# Altium PCB ver7.PcbDoc
Units mm, origin at the board's own origin, x right, y up, seen from the top; angles counter-clockwise.
Board outline 73.02 x 118.13 mm, 2 copper layers (Top Layer, Bottom Layer); 39 components, 19 nets, 171 pads, 12 vias.
Unrouted connection lines stored in the file: 87.
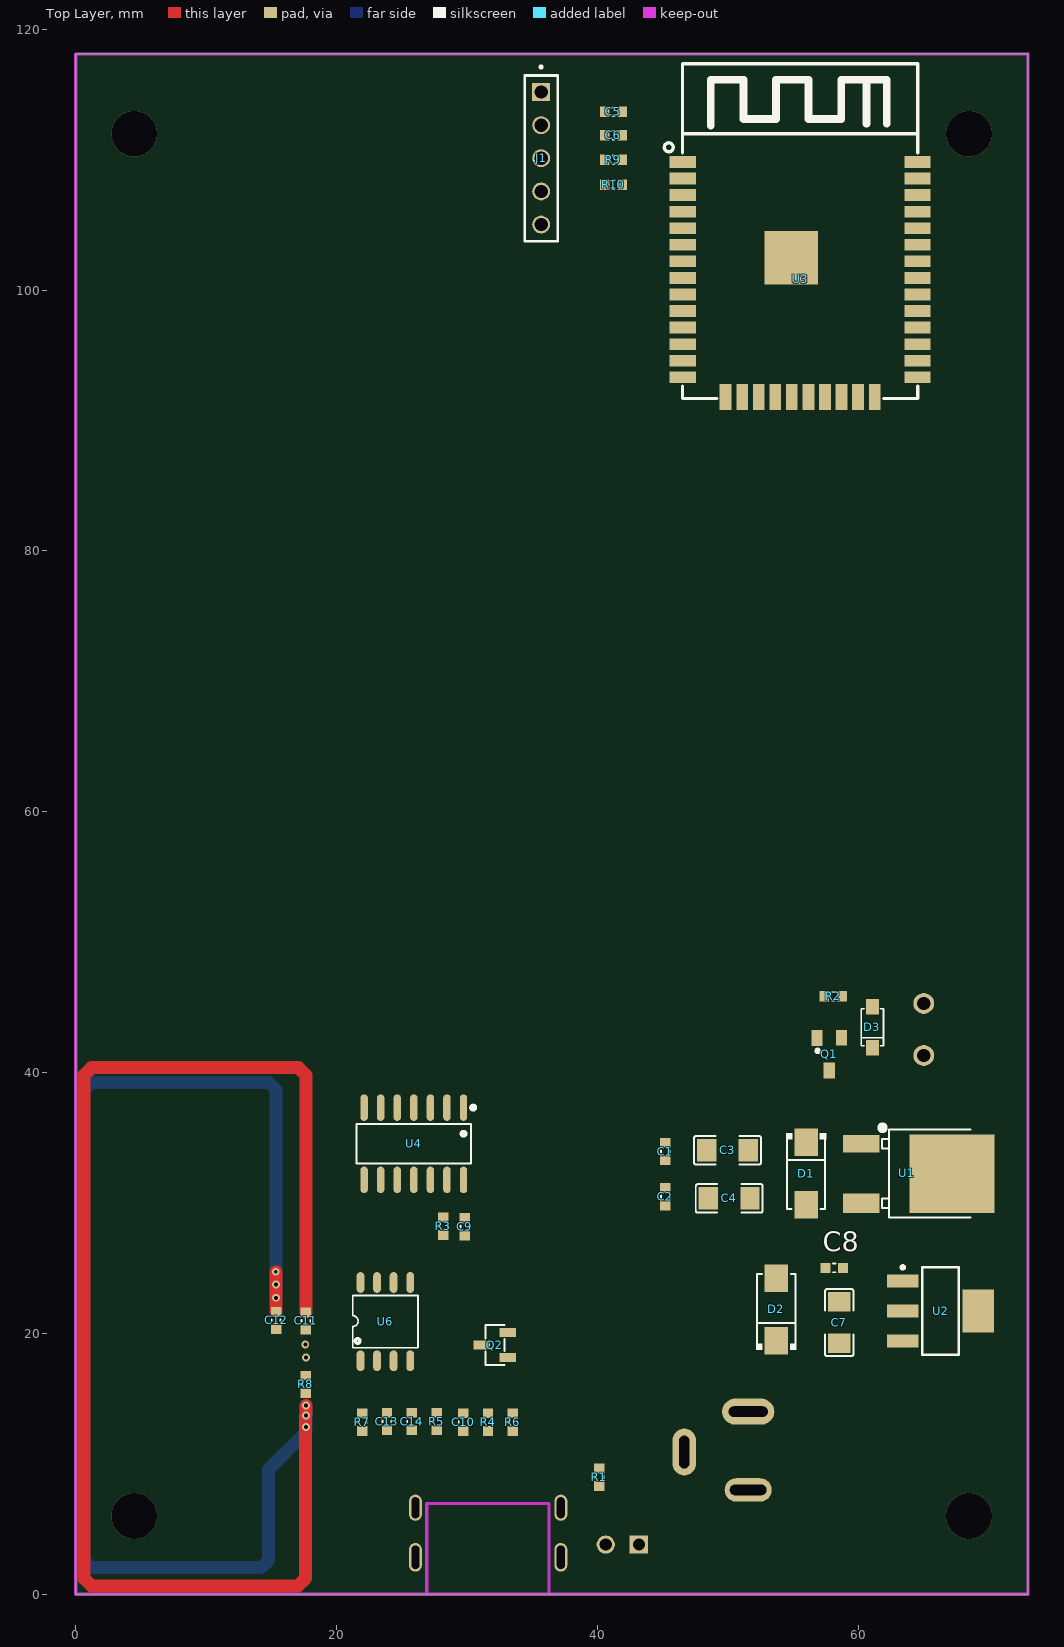
[diagram p0: Top Layer view]
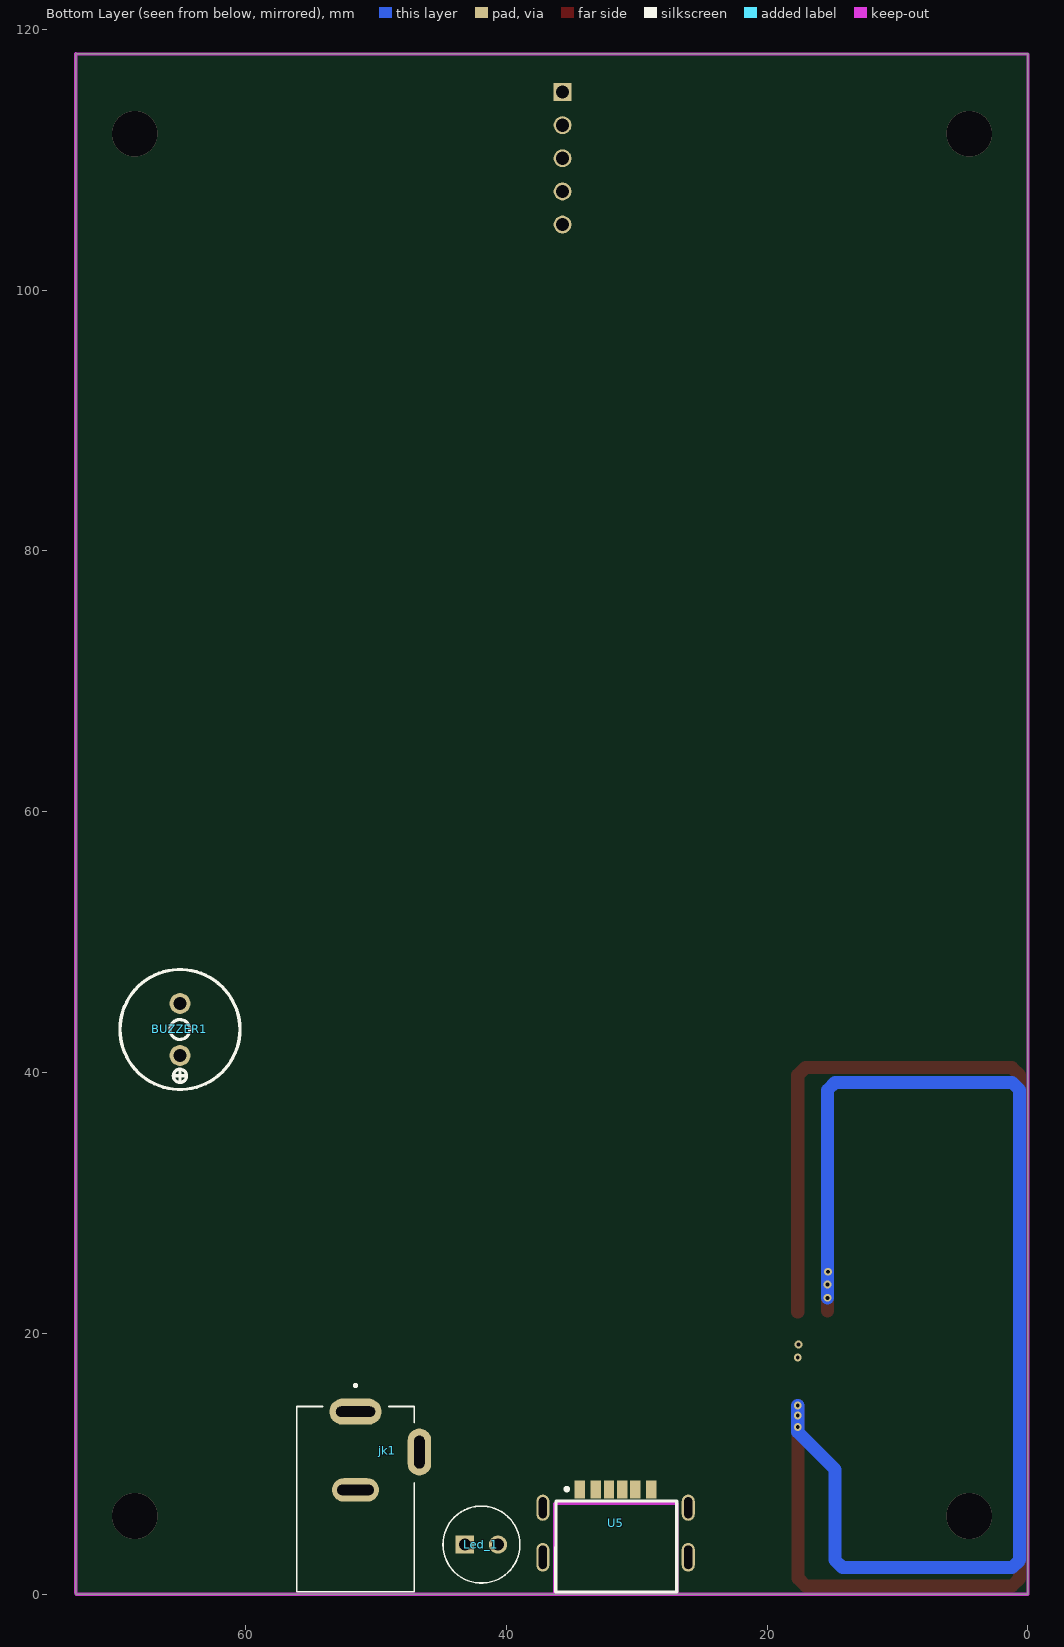
[diagram p1: Bottom Layer view, seen from below]

## Layer stack, top to bottom
Top Solder: solder mask 0.0102, Solder Resist, Dk 3.5
Top Layer: signal copper 0.0356
Dielectric 1: dielectric 0.32, FR-4, Dk 4.8
Bottom Layer: signal copper 0.0356
Bottom Solder: solder mask 0.0102, Solder Resist, Dk 3.5

## Board outline
0,0 73,0 73.016,0.127 73.016,118.127 73,118.109 0,118.11

## Design rules (kind name [scope] priority, off if disabled: settings)
Clearance [All] p1: gap=0.508 ignorepadtopadclearanceinfootprint=FALSE
PolygonConnect [All] p1: connectstyle=Relief reliefconductorwidth=0.254 reliefentries=4 polygonreliefangle="90 Angle" airgapwidth=0.254
RoutingVias [All] p1: holewidth=0.4 width=0.8 viastyle="Through Hole" minholewidth=0.3 minwidth=0.6 maxholewidth=0.4 maxwidth=0.8
SolderMaskExpansion [All] p1: expansion=0.102 istentingtop=FALSE
Width [InNet('3V3') or ('5V') or InNet('9V') or InNet('GND')] p1: maxlimit=0.381 minlimit=0.254 preferedwidth=0.381
Width Width_1 [All] p2: maxlimit=0.762 minlimit=0.254 preferedwidth=0.381
30 further rules are at their usual default settings.

## Classes and differential pairs
component class ver_4: BUZZER1 C1 C2 C3 C4 C6 C7 C9 C10 C12 C13 C14 D1 D2 D3 jk1 Led_1 Q Q1 Q2 R1 R2 R3 R4 R5 R6 R7 R8 R9 R10 U1 U2 U3 U4 U5 U6

## Components (designator, comment, footprint, x,y, rotation, side; value= is the part's Value field where it differs from the comment)
BUZZER1 "buzzer_9x5.5" buzzer_9x5.5 65.024,43.307 r0 bottom
C1 "0.1uF" CN-SMD-0603 45.212,33.949 r90 top
C2 "0.1uF" CN-SMD-0603 45.212,30.48 r270 top
C3 "22uF" cap_1206 49.98,34.036 r0 top
C4 "22uF" cap_1206 50.107,30.353 r0 top
C5 "0.1uF" CN-SMD-0603 41.235,113.665 r0 top
C6 "10uF" CN-SMD-0603 41.235,111.887 r0 top
C7 "22uF" cap_1206 58.547,20.828 r270 top
C8 "0.1uF" CN-SMD-0603 58.166,25.019 r180 top
C9 "104" CN-SMD-0603 29.845,28.194 r90 top
C10 "150pF" CN-SMD-0603 29.709,13.205 r270 top
C11 "100pF" CN-SMD-0603 17.653,20.955 r90 top
C12 "1nF" CN-SMD-0603 15.367,20.995 r90 top
C13 "104" CN-SMD-0603 23.867,13.245 r270 top
C14 "104" CN-SMD-0603 25.772,13.245 r270 top
D1 "diode_1N4007(M7)" diode_1N4007-M7 56.007,32.258 r270 top
D2 "diode_1N4007(M7)" diode_1N4007-M7 53.721,21.844 r90 top
D3 "1N4148" SOD-123 61.047,43.425 r270 top value=1N4007
J1 "JP5x1" JP5x1 35.687,117.094 r270 top
jk1 "jack dc" "jack dc" 51.562,14.001 r270 bottom
Led_1 "led_5mm" led_5mm 41.91,3.81 r180 bottom
Q1 "AO3400" SOT23B 57.785,41.402 r180 top value=C1815
Q2 "J3Y" j3y -398.459,440.676 r0 top
R1 "1K" RES-SMD-0603 40.132,8.977 r90 top value="R1/4W - 1K"
R2 "1K" RES-SMD-0603 58.079,45.847 r0 top value="R1/4W - 1K"
R3 "2.2K" RES-SMD-0603 28.194,28.234 r90 top value="R1/4W - 1K"
R4 "6.8K" RES-SMD-0603 31.614,13.205 r90 top value="R1/4W - 1K"
R5 "1K" RES-SMD-0603 27.677,13.245 r270 top value="R1/4W - 1K"
R6 "2.2K" RES-SMD-0603 33.519,13.205 r270 top value="R1/4W - 1K"
R7 "47K" RES-SMD-0603 21.962,13.205 r90 top value="R1/4W - 1K"
R8 "1K5" RES-SMD-0603 17.653,16.089 r90 top value="R1/4W - 1K"
R9 "10K" RES-SMD-0603 41.235,109.982 r180 top value="R1/4W - 1K"
R10 "10K" RES-SMD-0603 41.235,108.077 r180 top value="R1/4W - 1K"
U1 "78M05" 78M05 64.643,32.385 r0 top
U2 "AMS1117" AMS1117-SOT223 66.315,21.717 r0 top
U3 "ESP32-WROOM-32" ESP-32-WROOM 54.911,102.503 r0 top
U4 "SN74HC14DRG4" 74HC14 26.035,34.544 r180 top
U5 "USB-TYPE-C-6-PIN-CONG" USB-TYPE-C-6-PIN-CONG 31.623,4.318 r180 bottom
U6 "MC12079" MC12079 23.74,20.904 r0 top

## Footprints (in the part's own frame and the unit in brackets; to place one, negate y for a bottom-side part, rotate by r counter-clockwise, add the part's x,y. Pads: shape width x height; smd on the part's side, far side on the other; paste and mask are expansions set on the pad)
74HC14 [mm]
  oval 0.574x2.038 smd paste+0 mask+0.051: 1(-3.699,-2.769) 2(-2.429,-2.769) 3(-1.159,-2.769) 4(0.111,-2.769) 5(1.381,-2.769) 6(2.651,-2.769) 7(3.921,-2.769) 8(3.921,2.769) 9(2.651,2.769) 10(1.381,2.769) 11(0.111,2.769) 12(-1.159,2.769) 13(-2.429,2.769) 14(-3.699,2.769)
  silkscreen extent -4.59,-2.92 4.51,1.52
78M05 [mm]
  rect 2.8x1.35 smd paste+0 mask+0.051: 1(-4.4,2.174)
  rect 2.8x1.5 smd paste+0 mask+0.051: 3(-4.4,-2.406)
  rect 6.5x6 smd paste+0 mask+0.051: 4(2.55,-0.134)
  silkscreen extent -2.98,-3.51 3.98,3.59
AMS1117-SOT223 [mm]
  rect 2.4x1 smd: 1(-2.9,2.3) 2(-2.9,0) 3(-2.9,-2.3)
  rect 2.4x3.3 smd: 2(2.9,0)
  silkscreen extent -3.02,-3.35 1.4,3.47, body extent -3.39,-3.27 3.5,3.23, height 1.72
buzzer_9x5.5 [mm]
  round 1.6 hole 1 paste+0 mask+0.051: 1(0,1.999) 2(0,-1.999)
  silkscreen extent -4.6,-4.6 4.6,4.6
cap_1206 [mm]
  rect 1.485x1.728 smd paste-100 mask+0.051: 1(-1.593,0) 2(1.593,0)
  silkscreen extent -2.56,-1.09 2.56,1.09
CN-SMD-0603 [mm]
  round 0.254 on Mech15: 0(0,0)
  rect 0.75x0.8 smd: 1(-0.675,0) 2(0.675,0)
  silkscreen extent -0.1,-0.34 0.1,0.34, body extent -0.8,-0.43 0.8,0.43, height 0.8
diode_1N4007-M7 [mm]
  rect 2.1x1.8 smd paste+0 mask+0.051: 1(-2.4,0) 2(2.4,0)
  silkscreen extent -3.08,-1.54 2.7,1.54
ESP-32-WROOM [mm]
  rect 2x0.9 smd paste+0 mask+0.05: 1(-8.367,7.326) 2(-8.367,6.056) 3(-8.367,4.786) 4(-8.367,3.516) 5(-8.367,2.246) 6(-8.367,0.976) 7(-8.367,-0.294) 8(-8.367,-1.564) 9(-8.367,-2.834) 10(-8.367,-4.104) 11(-8.367,-5.374) 12(-8.367,-6.644) 13(-8.367,-7.914) 14(-8.367,-9.184) 25(9.633,-9.184) 26(9.633,-7.914) 27(9.633,-6.644) 28(9.633,-5.374) 29(9.633,-4.104) 30(9.633,-2.834) 31(9.633,-1.564) 32(9.633,-0.294) 33(9.633,0.976) 34(9.633,2.246) 35(9.633,3.516) 36(9.633,4.786) 37(9.633,6.056) 38(9.633,7.326)
  rect 0.9x2 smd paste+0 mask+0.05: 15(-5.082,-10.684) 16(-3.812,-10.684) 17(-2.542,-10.684) 18(-1.272,-10.684) 19(-0.002,-10.684) 20(1.268,-10.684) 21(2.538,-10.684) 22(3.808,-10.684) 23(5.078,-10.684) 24(6.348,-10.684)
  rect 4.1x4.1 smd paste+0 mask+0.05: 39(-0.047,-0.014)
  silkscreen extent -9.78,-10.81 9.65,14.86
j3y [mm]
  rect 1.25x0.7 smd paste+0 mask+0.051: 1(431.596,-422.514) 2(431.596,-420.614) 3(429.597,-421.564)
  silkscreen extent 429.87,-423.09 431.32,-420.04
"jack dc" [mm]
  oval 2x4 hole 0.8 slot 3 at 90 deg: 1(0,0)
  oval 1.8x3.6 hole 0.8 slot 2.8 at 90 deg: 2(6,0)
  oval 3.6x1.8 hole 0.8 slot 2.5 at 0 deg: 3(3.1,4.9)
  silkscreen extent -2.1,-4.5 13.8,4.5
JP5x1 [mm]
  rect 1.37x1.37 hole 1.02: 01(1.905,0)
  round 1.37 hole 1.02: 02(4.445,0) 03(6.985,0) 04(9.525,0) 05(12.065,0)
  silkscreen extent -0.11,-1.27 13.33,1.27
led_5mm [mm]
  round 1.4 hole 0.93: A(1.27,0)
  rect 1.4x1.4 / inner round 1.4 / far side rect 1.4x1.4 hole 0.93: C(-1.27,0)
  silkscreen extent -2.95,-2.95 2.95,2.95, body extent -2.5,-2.95 2.95,2.95, height 9.6
MC12079 [mm]
  oval 0.6x1.6 smd paste+0 mask+0.051: 1(-1.905,-3) 2(-0.635,-3) 3(0.635,-3) 4(1.905,-3) 5(1.905,3) 6(0.635,3) 7(-0.635,3) 8(-1.905,3)
  silkscreen extent -2.5,-2 2.5,2
RES-SMD-0603 [mm]
  round 0.254 on Mech15: 0(0,0)
  rect 0.75x0.8 smd: 1(-0.675,0) 2(0.675,0)
  silkscreen extent -0.1,-0.34 0.1,0.34, body extent -0.8,-0.4 0.8,0.4, height 0.43
SOD-123 [mm]
  rect 1.2x1 smd: 1(-1.635,0.04) 2(1.515,0.04)
  silkscreen extent -1.48,-0.81 1.37,0.89, body extent -1.98,-0.81 1.87,0.89, height 1.43
SOT23B [mm]
  rect 0.85x1.2 smd: 1(0.946,-1.255) 2(0.006,1.24) 3(-0.944,-1.26)
  silkscreen extent 0.77,-0.39 1.02,-0.14, body extent -1.49,-1.31 1.51,1.19, height 1.06
USB-TYPE-C-6-PIN-CONG [mm]
  oval 1x2.2 hole 0.6 slot 1.8 at 90 deg paste+0 mask+0.051: 7(-5.575,-1.482) 8(5.575,-1.482)
  oval 1x2 hole 0.6 slot 1.6 at 90 deg paste+0 mask+0.051: 7(-5.575,2.318) 8(5.575,2.318)
  rect 0.8x1.4 smd paste-100 mask+0.051: A5(-0.5,3.718) A9(1.52,3.718) A12(2.75,3.718) B5(0.5,3.718) B9(-1.52,3.718) B12(-2.75,3.718)
  Keep-Out Layer lines w0.254: 4.715,-4.251 4.715,2.649 -4.455,2.649 -4.66,2.649 -4.66,-4.291
  silkscreen extent -4.58,-4.14 4.69,3.88

## Part data
C1 C2 C8: library part "CAP 104"
C3 C4 C7: library part cap_1206
C5 C6 C9 C10 C11 C12 C13 C14: library part "Tu 0805_1", "Tu 0805", Bottom=10, Right=20
D3: library part D1A, "Diode 1A"
Q1: library part C1815, "NPN 600mW, ECB"
Q2: library part S8050/J3Y/0.4
R1 R2: library part Res, "Resistor 1/4W"
R3 R4 R5 R6 R7 R8 R9 R10: library part "Tro 0805_1", "Tro 0805"

## Via types
v1: diameter 0.6, hole 0.3, Top Layer to Bottom Layer, 8 vias
v2: diameter 3.5, hole 3.5, Top Layer to Bottom Layer, 4 vias

## Nets (pads, with @x,y where several pads share a name; then routed paths per layer and width w, separated by ;. In a path a pad name is that pad's centre, name@x,y a point inside that pad or via, vN(x,y) a via of type N, cw(c..) or ccw(c..) an arc to the next point about the centre after c; other vN are vias at no path point)
3V3: C5.2 C6.2 C7.2 C8.2 D2.2 R9.2 R10.2 U2.2 U3.2
4A: Q2.3 R3.2 R4.2 U4.9
4Y: U4.8 U4.11
5V: BUZZER1.1 C2.2 C4.2 C9.2 C13.2 C14.2 D1.2 D2.1 D3.2 R1.2 R3.1 R7.1 U1.3 U2.3 U4.14 U5.A9 U5.B9 U6.2
9V: C1.2 C3.2 D1.1 jk1.1 U1.1
buzzer: R2.1
GND: C1.1 C2.1 C3.1 C4.1 C5.1 C6.1 C7.1 C8.1 C9.1 C13.1 C14.1 J1.01 jk1.2 jk1.3 Led_1.C Q1.1 Q2.2 R5.2 R6.2 U1.4 U2.1 U3.1 U3.15 U3.38 U3.39 U4.7 U5.A12 U5.B12 U6.3 U6.5 U6.6
IO0: J1.05 R10.1 U3.25
IO4: U3.26 U4.10
NetBUZZER1_2: BUZZER1.2 D3.1 Q1.2
NetC10_1: C10.1 Q2.1 R4.1 R6.1
NetC11_1: C11.1 C12.1 R8.2 U6.8
NetC11_2: C11.2 C12.2 R7.2 R8.1 U6.1
Netled_1_A: Led_1.A R1.1
NetQ1_3: Q1.3 R2.2
OUT: C10.2 R5.1 U6.4
RST: J1.02 R9.1 U3.3
RX0: J1.04 U3.34
TX0: J1.03 U3.35
pads on no net: C1.0 C2.0 C5.0 C6.0 C8.0 C9.0 C10.0 C11.0 C12.0 C13.0 C14.0 R1.0 R2.0 R3.0 R4.0 R5.0 R6.0 R7.0 R8.0 R9.0 R10.0 U3.4 U3.5 U3.6 U3.7 U3.8 U3.9 U3.10 U3.11 U3.12 U3.13 U3.14 U3.16 U3.17 U3.18 U3.19 U3.20 U3.21 U3.22 U3.23 U3.24 U3.27 U3.28 U3.29 U3.30 U3.31 U3.32 U3.33 U3.36 U3.37 U4.1 U4.2 U4.3 U4.4 U4.5 U4.6 U4.12 U4.13 U5.7 U5.8 U5.A5 U5.B5 U6.7
copper on no net: | length 202.8
  Top Layer w1: 15.367,21.717 v1(15.367,22.733) v1(15.367,23.749) v1@15.367,24.728 ; v1@17.624,13.716 17.624,12.827 17.624,1.221 17.038,0.635 1.221,0.635 0.635,1.221 0.635,38.608 0.635,39.8 1.221,40.386 17.067,40.386 17.653,39.8 17.653,21.651 ; v1(17.653,13.716) v1(17.653,14.478)
  Bottom Layer w1: v1(15.367,22.733) 15.367,38.662 14.781,39.248 1.221,39.248 0.635,38.662 0.635,2.622 1.221,2.037 14.206,2.037 14.791,2.622 14.791,9.584 17.653,12.446 v1(17.653,12.827) v1(17.653,13.716) v1(17.653,14.478)
  other v1: 17.653,18.161 17.604,19.158 15.335,24.728
  other v2: 4.5,6 68.5,6 4.5,112 68.5,112

## Keep-outs
Keep-Out Layer:
  lines w0.254: 0,118 0,0 73,0 ; 0,118.11 73,118.109 ; 73.016,0.127 73.016,118.127